# Altium PCB 12.4呼叫器.PcbDoc (part 4 of 5)
Units mm, origin at the board's own origin, x right, y up, seen from the top; angles counter-clockwise.
Board outline 60 x 92 mm, 2 copper layers (Top Layer, Bottom Layer); 66 components, 44 nets, 270 pads, 58 vias.
Unrouted connection lines stored in the file: 4.
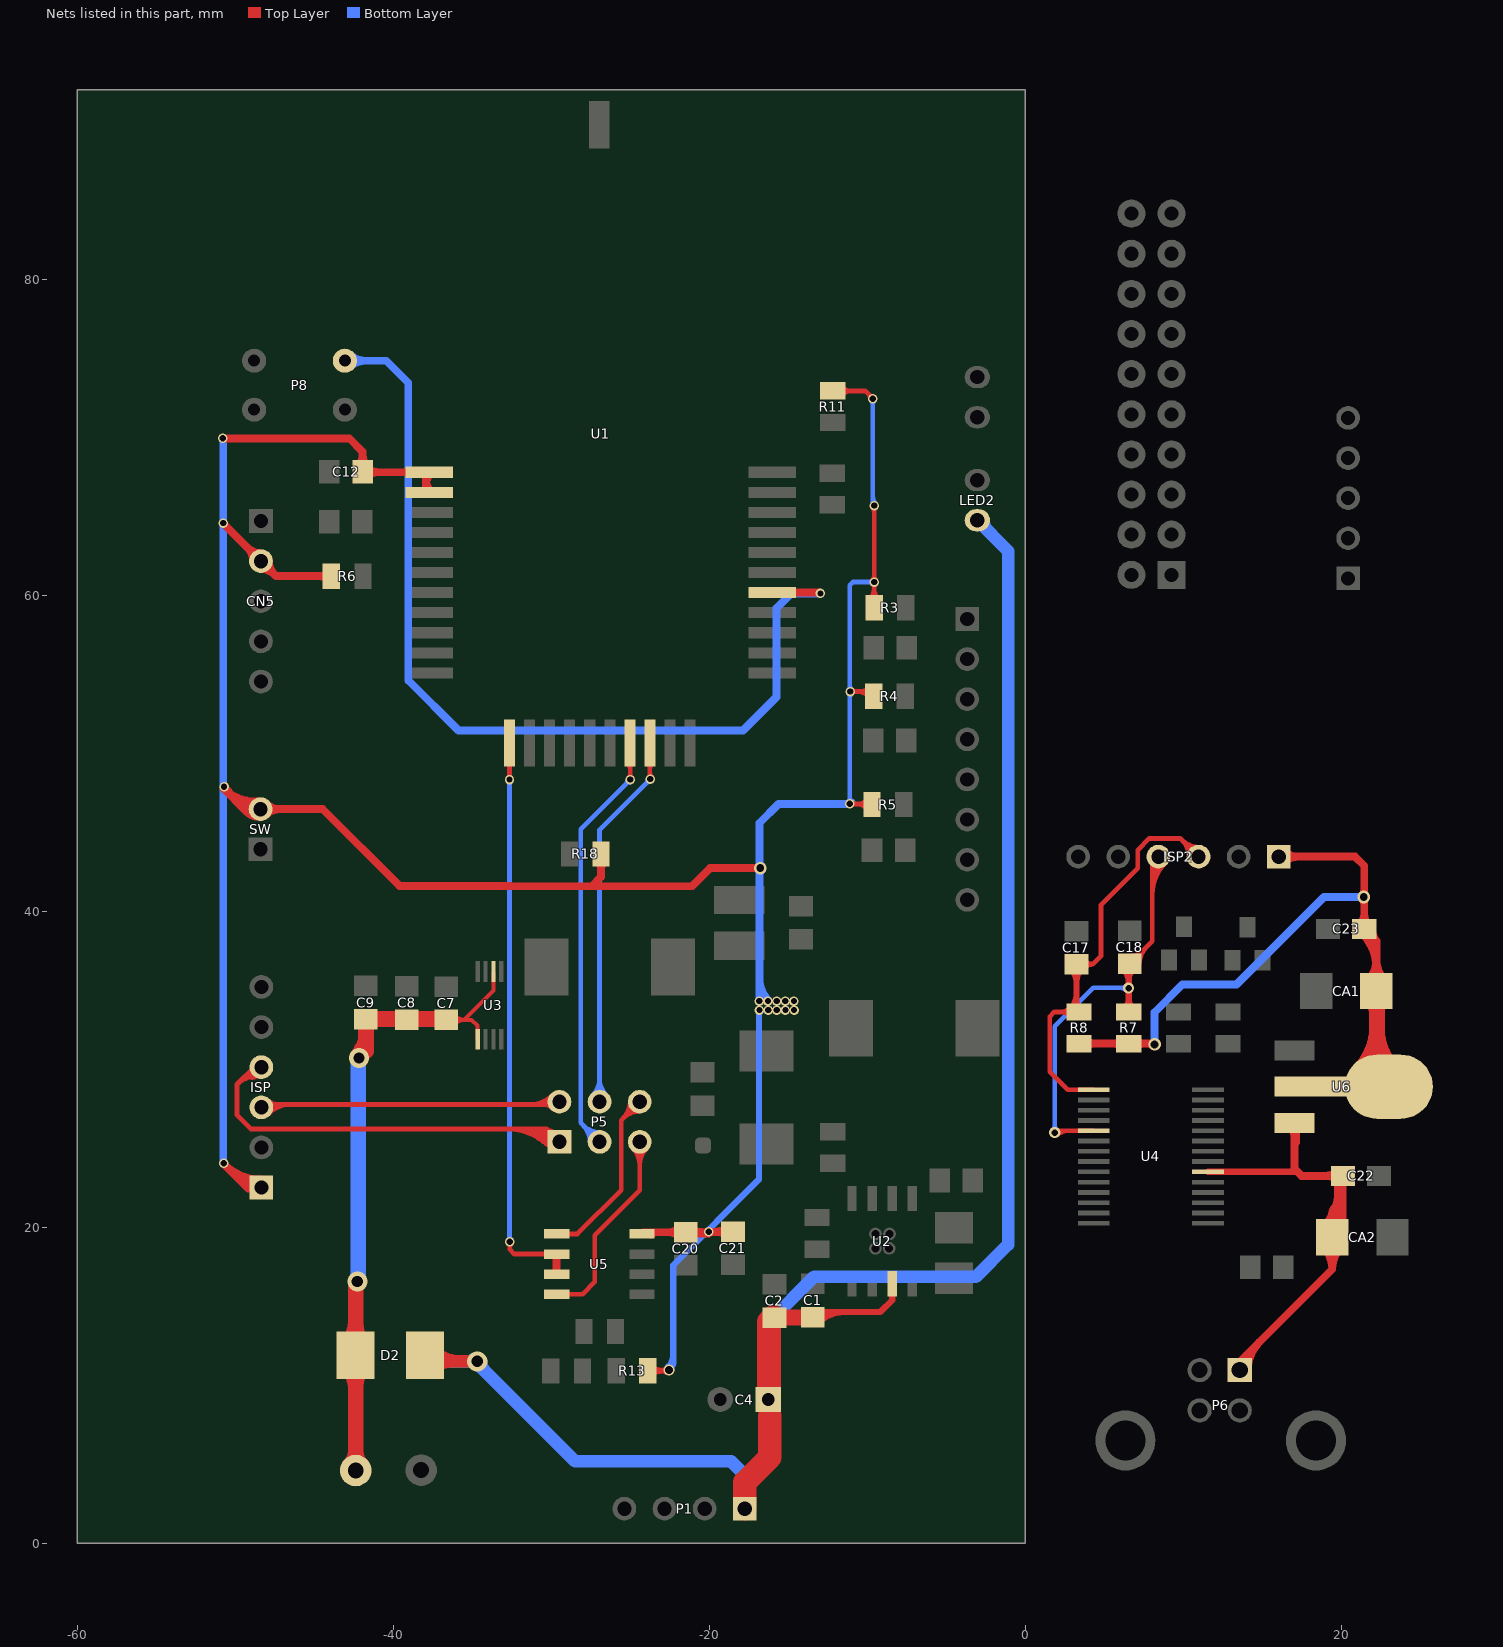
[diagram p4: the nets of this part, all layers, seen from the top]

## Via types
v1: diameter 0.6, hole 0.4, Top Layer to Bottom Layer, 39 vias
v2: diameter 0.7, hole 0.4, Top Layer to Bottom Layer, 11 vias
v3: diameter 1.27, hole 0.711, Top Layer to Bottom Layer, 3 vias
v4: diameter 0.8, hole 0.5, Top Layer to Bottom Layer, 3 vias
v5: diameter 0.65, hole 0.35, Top Layer to Bottom Layer, 1 vias
v6: diameter 0.7, hole 0.5, Top Layer to Bottom Layer, 1 vias

## Nets (pads, with @x,y where several pads share a name; then routed paths per layer and width w, separated by ;. In a path a pad name is that pad's centre, name@x,y a point inside that pad or via, vN(x,y) a via of type N, cw(c..) or ccw(c..) an arc to the next point about the centre after c; other vN are vias at no path point) (continued)
SHINENG: U1.12 U5.2 U5.3 | length 47.2
  Top Layer w0.3: v1(-32.632,48.33) U1.12@-32.632,50.643 ; v1(-32.614,19.071) -32.614,18.593 -32.32,18.299 U5.2@-29.649,18.299 ; U1.12@-32.773,49.352 cw(c-33.115,49.01) -32.632,49.01 ; U1.12@-32.773,49.352 cw(c-33.115,49.01) -32.632,49.01 ; U1.12@-32.773,49.352 cw(c-33.115,49.01) -32.632,49.01 ; v1@-32.738,48.436 ccw(c-32.994,48.692) -32.632,48.692 ; v1@-32.738,48.436 ccw(c-32.994,48.692) -32.632,48.692 ; v1@-32.738,48.436 ccw(c-32.994,48.692) -32.632,48.692 ; v1@-32.72,18.965 cw(c-32.976,18.709) -32.614,18.709 ; v1@-32.72,18.965 cw(c-32.976,18.709) -32.614,18.709 ; v1@-32.72,18.965 cw(c-32.976,18.709) -32.614,18.709 ; -32.632,48.692 ccw(c-32.27,48.692) v1@-32.526,48.436 ; -32.632,48.692 ccw(c-32.27,48.692) v1@-32.526,48.436 ; -32.632,48.692 ccw(c-32.27,48.692) v1@-32.526,48.436 ; -32.632,49.01 cw(c-32.149,49.01) U1.12@-32.491,49.352 ; -32.632,49.01 cw(c-32.149,49.01) U1.12@-32.491,49.352 ; -32.632,49.01 cw(c-32.149,49.01) U1.12@-32.491,49.352 ; -32.614,18.709 cw(c-32.252,18.709) v1@-32.508,18.965 ; -32.614,18.709 cw(c-32.252,18.709) v1@-32.508,18.965 ; -32.614,18.709 cw(c-32.252,18.709) v1@-32.508,18.965 ; -30.512,18.299 cw(c-30.512,17.937) U5.2@-30.255,18.193 ; -30.512,18.299 ccw(c-30.512,18.661) U5.2@-30.255,18.405 ; -30.512,18.299 ccw(c-30.512,18.661) U5.2@-30.255,18.405 ; -30.512,18.299 cw(c-30.512,17.937) U5.2@-30.255,18.193 ; -30.512,18.299 ccw(c-30.512,18.661) U5.2@-30.255,18.405 ; -30.512,18.299 cw(c-30.512,17.937) U5.2@-30.255,18.193
  Top Layer w0.5: U5.3@-29.649,17.029 U5.2@-29.649,18.299
  Bottom Layer w0.3: v1@-32.632,19.068 v1(-32.632,48.33) v1@-32.63,48.33 ; v1@-32.738,48.224 cw(c-32.994,47.968) -32.632,47.968 ; v1@-32.738,48.224 cw(c-32.994,47.968) -32.632,47.968 ; v1@-32.738,48.224 cw(c-32.994,47.968) -32.632,47.968 ; v1@-32.72,19.177 ccw(c-32.932,19.389) -32.632,19.389 ; v1@-32.72,19.177 ccw(c-32.932,19.389) -32.632,19.389 ; v1@-32.72,19.177 ccw(c-32.932,19.389) -32.632,19.389 ; -32.632,19.477 ccw(c-32.208,19.477) v1@-32.508,19.177 ; -32.632,19.477 ccw(c-32.208,19.477) v1@-32.508,19.177 ; -32.632,19.477 ccw(c-32.208,19.477) v1@-32.508,19.177 ; -32.632,47.968 cw(c-32.27,47.968) v1@-32.526,48.224 ; -32.632,47.968 cw(c-32.27,47.968) v1@-32.526,48.224 ; -32.632,47.968 cw(c-32.27,47.968) v1@-32.526,48.224
SRST: P8.1 U1.26 | length 66.6
  Top Layer w0.5: U1.26@-16.003,60.16 -13,60.16 v1(-12.95,60.11)
  Bottom Layer w0.5: P8.1@-43.053,74.84 -40.437,74.84 -39.04,73.443 -39.04,54.61 -35.865,51.435 -17.856,51.435 -15.73,53.561 -15.73,59.18 -14.8,60.11 v1(-12.95,60.11) ; P8.1@-42.691,74.478 cw(c-41.817,73.604) -41.817,74.84 ; P8.1@-42.691,74.478 cw(c-41.817,73.604) -41.817,74.84 ; P8.1@-42.691,74.478 cw(c-41.817,73.604) -41.817,74.84 ; P8.1@-42.691,75.202 ccw(c-41.817,76.076) -41.817,74.84 ; P8.1@-42.691,75.202 ccw(c-41.817,76.076) -41.817,74.84 ; P8.1@-42.691,75.202 ccw(c-41.817,76.076) -41.817,74.84
UART_RXD: P5.5 U1.19 | length 36.2
  Top Layer w0.3: v1@-23.856,48.436 -23.78,48.36 v1(-23.72,48.36) -23.75,48.33 -23.75,50.635 U1.19@-23.742,50.643 ; U1.19@-23.883,49.352 cw(c-24.206,49.029) -23.75,49.029 ; U1.19@-23.883,49.352 cw(c-24.206,49.029) -23.75,49.029 ; U1.19@-23.883,49.352 cw(c-24.206,49.029) -23.75,49.029 ; -23.75,48.795 ccw(c-23.285,48.795) v1@-23.614,48.466 ; -23.75,48.795 ccw(c-23.285,48.795) v1@-23.614,48.466 ; -23.75,48.795 ccw(c-23.285,48.795) v1@-23.614,48.466 ; -23.75,48.991 cw(c-23.24,48.991) U1.19@-23.601,49.352 ; -23.75,48.991 cw(c-23.24,48.991) U1.19@-23.601,49.352 ; -23.75,48.991 cw(c-23.24,48.991) U1.19@-23.601,49.352
  Bottom Layer w0.3: P5.5@-26.93,27.94 -26.93,45.15 v1(-23.72,48.36) ; P5.5@-27.354,28.364 ccw(c-28.379,29.389) -26.93,29.389 ; P5.5@-27.354,28.364 ccw(c-28.379,29.389) -26.93,29.389 ; P5.5@-27.354,28.364 ccw(c-28.379,29.389) -26.93,29.389 ; -26.93,29.389 ccw(c-25.481,29.389) P5.5@-26.506,28.364 ; -26.93,29.389 ccw(c-25.481,29.389) P5.5@-26.506,28.364 ; -26.93,29.389 ccw(c-25.481,29.389) P5.5@-26.506,28.364 ; -23.976,48.104 cw(c-23.72,47.848) v1@-23.72,48.21 ; -23.976,48.104 ccw(c-24.232,48.36) v1@-23.87,48.36 ; -23.976,48.104 ccw(c-24.232,48.36) v1@-23.87,48.36 ; -23.976,48.104 cw(c-23.72,47.848) v1@-23.72,48.21 ; -23.976,48.104 ccw(c-24.232,48.36) v1@-23.87,48.36 ; -23.976,48.104 cw(c-23.72,47.848) v1@-23.72,48.21
"UART_RXD 485": P5.6 U5.1 | length 26.8
  Top Layer w0.3: U5.1@-29.649,19.569 -28.335,19.569 -25.558,22.346 -25.558,26.772 P5.6@-24.39,27.94 ; U5.1@-29.043,19.463 cw(c-28.787,19.207) -28.787,19.569 ; U5.1@-29.043,19.463 cw(c-28.787,19.207) -28.787,19.569 ; U5.1@-29.043,19.463 cw(c-28.787,19.207) -28.787,19.569 ; U5.1@-29.043,19.675 ccw(c-28.787,19.931) -28.787,19.569 ; U5.1@-29.043,19.675 ccw(c-28.787,19.931) -28.787,19.569 ; U5.1@-29.043,19.675 ccw(c-28.787,19.931) -28.787,19.569 ; -25.414,26.916 cw(c-24.39,25.891) P5.6@-24.39,27.34 ; -25.414,26.916 ccw(c-26.439,27.94) P5.6@-24.99,27.94 ; -25.414,26.916 ccw(c-26.439,27.94) P5.6@-24.99,27.94 ; -25.414,26.916 cw(c-24.39,25.891) P5.6@-24.39,27.34 ; -25.414,26.916 ccw(c-26.439,27.94) P5.6@-24.99,27.94 ; -25.414,26.916 cw(c-24.39,25.891) P5.6@-24.39,27.34 ; -25.193,27.184 cw(c-24.18,26.913) P5.6@-24.39,27.94 ; -25.193,27.184 cw(c-24.18,26.913) P5.6@-24.39,27.94 ; -25.193,27.184 cw(c-24.18,26.913) P5.6@-24.39,27.94 ; -25.146,27.137 ccw(c-25.417,28.15) P5.6@-24.39,27.94 ; -25.146,27.137 ccw(c-25.417,28.15) P5.6@-24.39,27.94 ; -25.146,27.137 ccw(c-25.417,28.15) P5.6@-24.39,27.94
UART_RXD_USB: C18.2 ISP2.4 ISP.4 P5.1 R7.1 U4.5 | length 161.1
  Top Layer w0.3: ISP.4@-48.311,30.124 ISP.4@-48.336,30.124 -48.793,30.124 -49.886,29.032 ; -30.429,25.913 ccw(c-29.889,26.22) P5.1@-29.607,25.667 ; -30.274,25.64 ccw(c-29.746,25.94) P5.1@-29.47,25.4 ; P5.1@-30.148,25.976 cw(c-30.141,24.721) P5.1@-29.259,25.613 ; v2(1.88,25.984) 1.995,26.1 U4.5@4.34,26.1 ; C18.2@6.563,36.603 C18.2@6.63,36.67 8.052,38.092 8.052,43.062 ISP2.4@8.44,43.45 ; C18.2@6.73,37.17 ccw(c6.73,38.136) 7.413,37.453 ; C18.2@6.93,36.67 cw(c7.654,36.67) C18.2@7.142,37.182 ; C18.2@7.23,36.67 cw(c8.679,36.67) 7.654,37.694 ; -49.886,29.032 cw(c-48.647,27.794) ISP.4@-48.416,29.53 ; -49.886,29.032 cw(c-48.647,27.794) ISP.4@-48.416,29.53 ; -49.886,29.032 cw(c-48.647,27.794) ISP.4@-48.416,29.53 ; -49.886,29.032 -49.886,27.102 -48.997,26.213 -30.283,26.213 ; -49.456,29.461 cw(c-48.546,28.551) ISP.4@-48.376,29.827 ; -49.456,29.461 cw(c-48.546,28.551) ISP.4@-48.376,29.827 ; -49.456,29.461 cw(c-48.546,28.551) ISP.4@-48.376,29.827 ; -49.042,29.741 cw(c-48.983,29.285) ISP.4@-48.702,29.649 ; -49.042,29.741 cw(c-48.983,29.285) ISP.4@-48.702,29.649 ; -49.042,29.741 cw(c-48.983,29.285) ISP.4@-48.702,29.649 ; -48.931,29.463 ccw(c-49.092,30.707) ISP.4@-48.099,29.941 ; -48.931,29.463 ccw(c-49.092,30.707) ISP.4@-48.099,29.941 ; -48.931,29.463 ccw(c-49.092,30.707) ISP.4@-48.099,29.941 ; -32.881,26.213 cw(c-32.881,21.989) P5.1@-29.894,24.976 ; -32.881,26.213 cw(c-32.881,21.989) P5.1@-29.894,24.976 ; -32.881,26.213 cw(c-32.881,21.989) P5.1@-29.894,24.976 ; -32.157,26.213 cw(c-32.157,22.713) P5.1@-29.682,25.188 ; -32.157,26.213 cw(c-32.157,22.713) P5.1@-29.682,25.188 ; -32.157,26.213 cw(c-32.157,22.713) P5.1@-29.682,25.188 ; -31.432,26.213 cw(c-31.432,23.438) P5.1@-29.47,25.4 ; -31.432,26.213 cw(c-31.432,23.438) P5.1@-29.47,25.4 ; -31.432,26.213 cw(c-31.432,23.438) P5.1@-29.47,25.4 ; -30.914,25.953 ccw(c-30.314,26.92) P5.1@-29.761,25.925 ; -30.914,25.953 ccw(c-30.314,26.92) P5.1@-29.761,25.925 ; -30.914,25.953 ccw(c-30.314,26.92) P5.1@-29.761,25.925 ; -30.821,25.646 ccw(c-30.446,26.164) P5.1@-29.942,25.77 ; -30.821,25.646 ccw(c-30.446,26.164) P5.1@-29.942,25.77 ; -30.821,25.646 ccw(c-30.446,26.164) P5.1@-29.942,25.77 ; -30.714,26.118 cw(c-31.424,24.889) P5.1@-30.05,25.248 ; -30.714,26.118 ccw(c-30.004,27.347) P5.1@-29.629,25.979 ; -30.714,26.118 ccw(c-30.004,27.347) P5.1@-29.629,25.979 ; -30.714,26.118 cw(c-31.424,24.889) P5.1@-30.05,25.248 ; -30.714,26.118 ccw(c-30.004,27.347) P5.1@-29.629,25.979 ; -30.714,26.118 cw(c-31.424,24.889) P5.1@-30.05,25.248 ; -30.708,26.213 cw(c-30.708,24.162) P5.1@-29.258,25.612 ; -30.708,26.213 cw(c-30.708,24.162) P5.1@-29.258,25.612 ; -30.708,26.213 cw(c-30.708,24.162) P5.1@-29.258,25.612 ; -30.568,25.463 ccw(c-30.2,25.972) P5.1@-29.706,25.585 ; -30.568,25.463 ccw(c-30.2,25.972) P5.1@-29.706,25.585 ; -30.568,25.463 ccw(c-30.2,25.972) P5.1@-29.706,25.585 ; -30.48,25.683 ccw(c-30.03,26.409) P5.1@-29.616,25.662 ; -30.48,25.683 ccw(c-30.03,26.409) P5.1@-29.616,25.662 ; -30.48,25.683 ccw(c-30.03,26.409) P5.1@-29.616,25.662 ; -30.316,25.281 ccw(c-29.955,25.779) P5.1@-29.47,25.4 ; -30.316,25.281 ccw(c-29.955,25.779) P5.1@-29.47,25.4 ; -30.316,25.281 ccw(c-29.955,25.779) P5.1@-29.47,25.4 ; -30.283,26.213 cw(c-30.849,25.646) P5.1@-30.061,25.506 ; -30.283,26.213 ccw(c-29.716,26.779) P5.1@-29.576,25.991 ; -30.283,26.213 ccw(c-29.716,26.779) P5.1@-29.576,25.991 ; -30.283,26.213 cw(c-30.849,25.646) P5.1@-30.061,25.506 ; -30.283,26.213 ccw(c-29.716,26.779) P5.1@-29.576,25.991 ; -30.283,26.213 cw(c-30.849,25.646) P5.1@-30.061,25.506 ; -30.283,26.213 P5.1@-29.47,25.4 ; -30.256,25.544 cw(c-30.494,25.16) P5.1@-30.054,25.263 ; -30.256,25.544 cw(c-30.494,25.16) P5.1@-30.054,25.263 ; -30.256,25.544 cw(c-30.494,25.16) P5.1@-30.054,25.263 ; v2@2.021,25.843 cw(c2.642,25.222) 2.642,26.1 ; v2@2.021,25.843 cw(c2.642,25.222) 2.642,26.1 ; v2@2.021,25.843 cw(c2.642,25.222) 2.642,26.1 ; v2@2.052,26.085 ccw(c2.221,26.183) 2.318,26.014 ; v2@2.052,26.085 ccw(c2.221,26.183) 2.318,26.014 ; v2@2.052,26.085 ccw(c2.221,26.183) 2.318,26.014 ; 8.052,41.064 cw(c10.826,41.064) ISP2.4@8.864,43.026 ; 8.052,41.064 cw(c10.826,41.064) ISP2.4@8.864,43.026 ; 8.052,41.064 cw(c10.826,41.064) ISP2.4@8.864,43.026 ; 8.052,41.789 cw(c10.101,41.789) ISP2.4@8.652,43.238 ; 8.052,41.789 cw(c10.101,41.789) ISP2.4@8.652,43.238 ; 8.052,41.789 cw(c10.101,41.789) ISP2.4@8.652,43.238 ; 8.052,42.513 cw(c9.377,42.513) ISP2.4@8.44,43.45 ; 8.052,42.513 cw(c9.377,42.513) ISP2.4@8.44,43.45 ; 8.052,42.513 cw(c9.377,42.513) ISP2.4@8.44,43.45 ; ISP2.4@8.096,42.959 cw(c7.881,42.651) 8.205,42.464 ; ISP2.4@8.096,42.959 cw(c7.881,42.651) 8.205,42.464 ; ISP2.4@8.096,42.959 cw(c7.881,42.651) 8.205,42.464 ; 8.316,42.657 cw(c8.714,42.427) ISP2.4@8.595,42.87 ; 8.316,42.657 cw(c8.714,42.427) ISP2.4@8.595,42.87 ; 8.316,42.657 cw(c8.714,42.427) ISP2.4@8.595,42.87
  Top Layer w0.4: R7.1@6.563,33.62 C18.2@6.563,36.603 ; C18.2@6.212,36.352 cw(c5.363,35.503) 6.563,35.503 ; C18.2@6.212,36.352 cw(c5.363,35.503) 6.563,35.503 ; C18.2@6.212,36.352 cw(c5.363,35.503) 6.563,35.503 ; R7.1@6.316,33.867 ccw(c5.718,34.465) 6.563,34.465 ; R7.1@6.316,33.867 ccw(c5.718,34.465) 6.563,34.465 ; R7.1@6.316,33.867 ccw(c5.718,34.465) 6.563,34.465 ; v2@6.447,35.022 cw(c6.167,34.742) 6.563,34.742 ; v2@6.447,35.022 cw(c6.167,34.742) 6.563,34.742 ; v2@6.447,35.022 cw(c6.167,34.742) 6.563,34.742 ; v2@6.447,35.234 ccw(c6.167,35.515) 6.563,35.515 ; v2@6.447,35.234 ccw(c6.167,35.515) 6.563,35.515 ; v2@6.447,35.234 ccw(c6.167,35.515) 6.563,35.515 ; 6.563,34.465 ccw(c7.408,34.465) R7.1@6.811,33.867 ; 6.563,34.465 ccw(c7.408,34.465) R7.1@6.811,33.867 ; 6.563,34.465 ccw(c7.408,34.465) R7.1@6.811,33.867 ; 6.563,35.664 cw(c7.536,35.664) C18.2@6.848,36.352 ; 6.563,35.664 cw(c7.536,35.664) C18.2@6.848,36.352 ; 6.563,35.664 cw(c7.536,35.664) C18.2@6.848,36.352
  Bottom Layer w0.3: v2(1.88,25.984) 1.88,32.715 4.318,35.154 6.528,35.154 v2(6.553,35.128) ; v2@1.738,26.126 ccw(c1.397,26.467) 1.88,26.467 ; v2@1.738,26.126 ccw(c1.397,26.467) 1.88,26.467 ; v2@1.738,26.126 ccw(c1.397,26.467) 1.88,26.467 ; 1.88,26.467 ccw(c2.362,26.467) v2@2.021,26.126 ; 1.88,26.467 ccw(c2.362,26.467) v2@2.021,26.126 ; 1.88,26.467 ccw(c2.362,26.467) v2@2.021,26.126 ; 6.009,35.154 cw(c6.009,34.584) v2@6.412,34.987 ; 6.009,35.154 cw(c6.009,34.584) v2@6.412,34.987 ; 6.009,35.154 cw(c6.009,34.584) v2@6.412,34.987 ; 6.132,35.154 ccw(c6.132,35.55) v2@6.412,35.27 ; 6.132,35.154 ccw(c6.132,35.55) v2@6.412,35.27 ; 6.132,35.154 ccw(c6.132,35.55) v2@6.412,35.27
UART_TXD: P5.2 U1.18 | length 46.5
  Top Layer w0.3: U1.18@-25.012,50.643 -24.99,50.621 v1(-24.99,48.33) ; U1.18@-25.153,49.352 cw(c-25.548,48.957) -24.99,48.957 ; U1.18@-25.153,49.352 cw(c-25.548,48.957) -24.99,48.957 ; U1.18@-25.153,49.352 cw(c-25.548,48.957) -24.99,48.957 ; v1@-25.096,48.436 ccw(c-25.352,48.692) -24.99,48.692 ; v1@-25.096,48.436 ccw(c-25.352,48.692) -24.99,48.692 ; v1@-25.096,48.436 ccw(c-25.352,48.692) -24.99,48.692 ; -24.99,48.692 ccw(c-24.628,48.692) v1@-24.884,48.436 ; -24.99,48.692 ccw(c-24.628,48.692) v1@-24.884,48.436 ; -24.99,48.692 ccw(c-24.628,48.692) v1@-24.884,48.436 ; -24.99,49.063 cw(c-24.582,49.063) U1.18@-24.871,49.352 ; -24.99,49.063 cw(c-24.582,49.063) U1.18@-24.871,49.352 ; -24.99,49.063 cw(c-24.582,49.063) U1.18@-24.871,49.352
  Bottom Layer w0.3: v1(-24.99,48.33) -28.13,45.19 -28.13,26.6 P5.2@-26.93,25.4 ; -27.954,26.424 cw(c-28.979,25.4) P5.2@-27.53,25.4 ; -27.954,26.424 ccw(c-26.93,27.449) P5.2@-26.93,26 ; -27.954,26.424 ccw(c-26.93,27.449) P5.2@-26.93,26 ; -27.954,26.424 cw(c-28.979,25.4) P5.2@-27.53,25.4 ; -27.954,26.424 ccw(c-26.93,27.449) P5.2@-26.93,26 ; -27.954,26.424 cw(c-28.979,25.4) P5.2@-27.53,25.4 ; -27.733,26.156 ccw(c-26.72,26.427) P5.2@-26.93,25.4 ; -27.733,26.156 ccw(c-26.72,26.427) P5.2@-26.93,25.4 ; -27.733,26.156 ccw(c-26.72,26.427) P5.2@-26.93,25.4 ; -27.686,26.203 cw(c-27.957,25.19) P5.2@-26.93,25.4 ; -27.686,26.203 cw(c-27.957,25.19) P5.2@-26.93,25.4 ; -27.686,26.203 cw(c-27.957,25.19) P5.2@-26.93,25.4 ; -25.246,48.074 cw(c-24.99,47.818) v1@-24.99,48.18 ; -25.246,48.074 ccw(c-25.502,48.33) v1@-25.14,48.33 ; -25.246,48.074 ccw(c-25.502,48.33) v1@-25.14,48.33 ; -25.246,48.074 cw(c-24.99,47.818) v1@-24.99,48.18 ; -25.246,48.074 ccw(c-25.502,48.33) v1@-25.14,48.33 ; -25.246,48.074 cw(c-24.99,47.818) v1@-24.99,48.18
"UART_TXD 485": P5.3 U5.4 | length 21.3
  Top Layer w0.3: U5.4@-29.649,15.759 -28.005,15.759 -27.229,16.535 -27.229,19.494 -24.39,22.333 P5.3@-24.39,25.4 ; U5.4@-29.043,15.653 cw(c-28.787,15.397) -28.787,15.759 ; U5.4@-29.043,15.653 cw(c-28.787,15.397) -28.787,15.759 ; U5.4@-29.043,15.653 cw(c-28.787,15.397) -28.787,15.759 ; U5.4@-29.043,15.865 ccw(c-28.787,16.121) -28.787,15.759 ; U5.4@-29.043,15.865 ccw(c-28.787,16.121) -28.787,15.759 ; U5.4@-29.043,15.865 ccw(c-28.787,16.121) -28.787,15.759 ; P5.3@-24.814,24.976 cw(c-25.839,23.951) -24.39,23.951 ; P5.3@-24.814,24.976 cw(c-25.839,23.951) -24.39,23.951 ; P5.3@-24.814,24.976 cw(c-25.839,23.951) -24.39,23.951 ; -24.39,23.951 cw(c-22.941,23.951) P5.3@-23.966,24.976 ; -24.39,23.951 cw(c-22.941,23.951) P5.3@-23.966,24.976 ; -24.39,23.951 cw(c-22.941,23.951) P5.3@-23.966,24.976
UART_TXD_USB: C17.2 ISP2.3 ISP.3 P5.4 R8.1 U4.1 | length 95.5
  Top Layer w0.3: ISP.3@-48.336,27.584 -48.158,27.762 -29.648,27.762 P5.4@-29.47,27.94 ; R8.1@3.25,33.62 1.86,33.62 1.57,33.33 1.57,29.83 2.7,28.7 U4.1@4.34,28.7 ; C17.2@3.25,36.64 4.28,36.64 ; ISP.3@-48.124,27.372 cw(c-47.183,26.431) -47.183,27.762 ; ISP.3@-48.124,27.372 cw(c-47.183,26.431) -47.183,27.762 ; ISP.3@-48.124,27.372 cw(c-47.183,26.431) -47.183,27.762 ; ISP.3@-47.912,27.16 cw(c-46.458,25.707) -46.458,27.762 ; ISP.3@-47.912,27.16 cw(c-46.458,25.707) -46.458,27.762 ; ISP.3@-47.912,27.16 cw(c-46.458,25.707) -46.458,27.762 ; ISP.3@-47.912,28.009 ccw(c-47.317,28.604) -47.317,27.762 ; ISP.3@-47.912,28.009 ccw(c-47.317,28.604) -47.317,27.762 ; ISP.3@-47.912,28.009 ccw(c-47.317,28.604) -47.317,27.762 ; -31.348,27.762 ccw(c-31.348,29.818) P5.4@-29.894,28.364 ; -31.348,27.762 ccw(c-31.348,29.818) P5.4@-29.894,28.364 ; -31.348,27.762 ccw(c-31.348,29.818) P5.4@-29.894,28.364 ; -30.624,27.762 ccw(c-30.624,29.094) P5.4@-29.682,28.152 ; -30.624,27.762 ccw(c-30.624,29.094) P5.4@-29.682,28.152 ; -30.624,27.762 ccw(c-30.624,29.094) P5.4@-29.682,28.152 ; -30.489,27.762 cw(c-30.489,26.921) P5.4@-29.894,27.516 ; -30.489,27.762 cw(c-30.489,26.921) P5.4@-29.894,27.516 ; -30.489,27.762 cw(c-30.489,26.921) P5.4@-29.894,27.516 ; 2.204,33.62 cw(c2.204,32.654) R8.1@2.887,33.337 ; 2.204,33.62 ccw(c2.204,34.586) R8.1@2.887,33.903 ; 2.204,33.62 ccw(c2.204,34.586) R8.1@2.887,33.903 ; 2.204,33.62 cw(c2.204,32.654) R8.1@2.887,33.337 ; 2.204,33.62 ccw(c2.204,34.586) R8.1@2.887,33.903 ; 2.204,33.62 cw(c2.204,32.654) R8.1@2.887,33.337 ; C17.2@3.767,36.364 cw(c4.28,36.024) 4.28,36.64 ; C17.2@3.767,36.364 cw(c4.28,36.024) 4.28,36.64 ; C17.2@3.767,36.364 cw(c4.28,36.024) 4.28,36.64 ; C17.2@3.767,36.916 ccw(c4.28,37.256) 4.28,36.64 ; C17.2@3.767,36.916 ccw(c4.28,37.256) 4.28,36.64 ; C17.2@3.767,36.916 ccw(c4.28,37.256) 4.28,36.64 ; 4.28,36.64 4.801,37.16 4.801,40.386 7.137,42.723 7.137,43.866 7.874,44.602 9.828,44.602 ISP2.3@10.98,43.45 ; 9.956,44.474 cw(c8.931,43.45) ISP2.3@10.38,43.45 ; 9.956,44.474 ccw(c10.98,45.499) ISP2.3@10.98,44.05 ; 9.956,44.474 ccw(c10.98,45.499) ISP2.3@10.98,44.05 ; 9.956,44.474 cw(c8.931,43.45) ISP2.3@10.38,43.45 ; 9.956,44.474 ccw(c10.98,45.499) ISP2.3@10.98,44.05 ; 9.956,44.474 cw(c8.931,43.45) ISP2.3@10.38,43.45 ; 10.177,44.206 ccw(c11.19,44.477) ISP2.3@10.98,43.45 ; 10.177,44.206 ccw(c11.19,44.477) ISP2.3@10.98,43.45 ; 10.177,44.206 ccw(c11.19,44.477) ISP2.3@10.98,43.45 ; 10.224,44.253 cw(c9.953,43.24) ISP2.3@10.98,43.45 ; 10.224,44.253 cw(c9.953,43.24) ISP2.3@10.98,43.45 ; 10.224,44.253 cw(c9.953,43.24) ISP2.3@10.98,43.45
  Top Layer w0.4: R8.1@3.25,33.79 C17.2@3.25,36.64 ; R8.1@2.923,33.867 ccw(c2.132,34.658) 3.25,34.658 ; R8.1@2.923,33.867 ccw(c2.132,34.658) 3.25,34.658 ; R8.1@2.923,33.867 ccw(c2.132,34.658) 3.25,34.658 ; C17.2@2.932,36.322 cw(c2.164,35.554) 3.25,35.554 ; C17.2@2.932,36.322 cw(c2.164,35.554) 3.25,35.554 ; C17.2@2.932,36.322 cw(c2.164,35.554) 3.25,35.554 ; 3.25,34.272 ccw(c3.822,34.272) R8.1@3.417,33.867 ; 3.25,34.272 ccw(c3.822,34.272) R8.1@3.417,33.867 ; 3.25,34.272 ccw(c3.822,34.272) R8.1@3.417,33.867 ; 3.25,35.554 cw(c4.336,35.554) C17.2@3.568,36.322 ; 3.25,35.554 cw(c4.336,35.554) C17.2@3.568,36.322 ; 3.25,35.554 cw(c4.336,35.554) C17.2@3.568,36.322
VCC: C22.2 CA2.1 P6.1 U4.20 U6.3 | length 60.3
  Top Layer w0.4: U4.20@11.579,23.5 17.24,23.5
  Top Layer w0.5: P6.1@13.589,10.947 13.589,11.481 19.444,17.336 CA2.1@19.444,19.363 CA2.1@19.96,19.879 ; P6.1@13.602,10.947 cw(c14.92,10.947) 13.988,11.88 ; P6.1@14.102,10.947 cw(c16.627,10.947) 14.841,12.733 ; 17.156,25.35 17.156,26.491 U6.3@17.056,26.591 17.056,23.684 17.24,23.5 17.49,23.25 C22.2@20.124,23.25 ; CA2.1@18.897,18.697 cw(c17.575,17.375) 19.444,17.375 cw(c21.313,17.375) CA2.1@19.991,18.697 ; U6.3@16.784,26.319 cw(c15.886,25.42) 17.156,25.42 ; U6.3@16.784,26.319 cw(c16.127,25.662) 17.056,25.662 ; U6.3@16.784,26.319 cw(c15.886,25.42) 17.156,25.42 ; U6.3@16.784,26.319 cw(c16.127,25.662) 17.056,25.662 ; U6.3@16.784,26.319 cw(c15.886,25.42) 17.156,25.42 ; U6.3@16.784,26.319 cw(c16.127,25.662) 17.056,25.662 ; 17.056,25.662 cw(c17.986,25.662) U6.3@17.329,26.319 ; 17.056,25.662 cw(c17.986,25.662) U6.3@17.329,26.319 ; 17.056,25.662 cw(c17.986,25.662) U6.3@17.329,26.319 ; 17.156,25.903 cw(c17.744,25.903) U6.3@17.329,26.319 ; 17.156,25.903 cw(c17.744,25.903) U6.3@17.329,26.319 ; 17.156,25.903 cw(c17.744,25.903) U6.3@17.329,26.319 ; 19.068,23.25 cw(c19.068,22.321) C22.2@19.725,22.978 ; 19.068,23.25 ccw(c19.068,24.179) C22.2@19.725,23.522 ; 19.068,23.25 ccw(c19.068,24.179) C22.2@19.725,23.522 ; 19.068,23.25 cw(c19.068,22.321) C22.2@19.725,22.978 ; 19.068,23.25 ccw(c19.068,24.179) C22.2@19.725,23.522 ; 19.068,23.25 cw(c19.068,22.321) C22.2@19.725,22.978
  Top Layer w0.8: CA2.1@19.96,19.879 19.96,23.086 C22.2@20.124,23.25 ; CA2.1@19.003,19.923 ccw(c16.692,22.234) 19.96,22.234 ; CA2.1@19.003,19.923 ccw(c16.692,22.234) 19.96,22.234 ; CA2.1@19.003,19.923 ccw(c16.692,22.234) 19.96,22.234 ; 19.675,21.087 ccw(c20.465,20.631) CA2.1@19.859,19.948 ; 19.675,21.087 ccw(c20.465,20.631) CA2.1@19.859,19.948 ; 19.675,21.087 ccw(c20.465,20.631) CA2.1@19.859,19.948 ; 19.96,22.593 cw(c20.654,22.593) C22.2@20.163,23.084 ; 19.96,22.593 cw(c20.654,22.593) C22.2@20.163,23.084 ; 19.96,22.593 cw(c20.654,22.593) C22.2@20.163,23.084
VCC_9V: C7.2 C8.2 C9.2 D2.1 pad.1@-42.367,4.597 U3.1 U3.8 | length 73.2
  Top Layer w0.254: C7.2@-36.5,33.126 -35.504,33.126 ; U3.1@-34.648,31.906 -34.648,32.748 -35.026,33.126 -35.504,33.126 ; U3.8@-33.648,36.081 -33.648,34.982 -35.504,33.126 ; C7.2@-36.117,32.816 cw(c-35.504,32.365) -35.504,33.126 ; C7.2@-36.117,32.816 cw(c-35.504,32.365) -35.504,33.126 ; C7.2@-36.117,32.816 cw(c-35.504,32.365) -35.504,33.126 ; C7.2@-36.117,33.436 ccw(c-35.504,33.887) -35.504,33.126 ; C7.2@-36.117,33.436 ccw(c-35.504,33.887) -35.504,33.126 ; C7.2@-36.117,33.436 ccw(c-35.504,33.887) -35.504,33.126
  Top Layer w1: v3(-42.266,16.561) -42.367,16.459 pad.1@-42.367,4.597 pad.1@-42.113,4.851 ; v3(-42.164,30.709) -41.721,31.151 C9.2@-41.721,33.166 -36.539,33.166 C7.2@-36.5,33.126 ; D2.1@-42.883,11.109 cw(c-44.128,9.864) -42.367,9.864 ; D2.1@-42.883,11.109 cw(c-44.128,9.864) -42.367,9.864 ; D2.1@-42.883,11.109 cw(c-44.128,9.864) -42.367,9.864 ; D2.1@-42.883,12.699 ccw(c-44.128,13.945) -42.367,13.945 ; D2.1@-42.883,12.699 ccw(c-44.128,13.945) -42.367,13.945 ; D2.1@-42.883,12.699 ccw(c-44.128,13.945) -42.367,13.945 ; pad.1@-42.721,4.951 ccw(c-43.574,5.805) -42.367,5.805 ; pad.1@-42.721,4.951 ccw(c-43.574,5.805) -42.367,5.805 ; pad.1@-42.721,4.951 ccw(c-43.574,5.805) -42.367,5.805 ; -42.367,5.805 ccw(c-41.16,5.805) pad.1@-42.014,4.951 ; -42.367,5.805 ccw(c-41.16,5.805) pad.1@-42.014,4.951 ; -42.367,5.805 ccw(c-41.16,5.805) pad.1@-42.014,4.951 ; -42.367,9.965 cw(c-40.748,9.965) D2.1@-41.893,11.109 ; -42.367,9.965 cw(c-40.748,9.965) D2.1@-41.893,11.109 ; -42.367,9.965 cw(c-40.748,9.965) D2.1@-41.893,11.109 ; -42.367,13.844 ccw(c-40.748,13.844) D2.1@-41.893,12.699 ; -42.367,13.844 ccw(c-40.748,13.844) D2.1@-41.893,12.699 ; -42.367,13.844 ccw(c-40.748,13.844) D2.1@-41.893,12.699 ; v3@-42.259,30.804 ccw(c-43.559,32.104) -41.721,32.104 ; v3@-42.259,30.804 ccw(c-43.559,32.104) -41.721,32.104 ; v3@-42.259,30.804 ccw(c-43.559,32.104) -41.721,32.104 ; v3@-42.034,30.744 cw(c-41.289,30.943) -41.957,31.329 ; v3@-42.034,30.744 cw(c-41.289,30.943) -41.957,31.329 ; v3@-42.034,30.744 cw(c-41.289,30.943) -41.957,31.329
  Bottom Layer w1: v3@-42.2,16.383 v3@-42.2,30.709
VCC_24V: C1.2 C2.2 C4.1 D2.2 LED2.1 P1.1 U2.7 | length 148
  Top Layer w0.4: C1.2@-13.355,14.385 -13.11,14.63 -9.164,14.63 -8.414,15.38 U2.7@-8.414,16.41 ; C1.2@-13.295,14.275 cw(c-12.437,13.417) -12.437,14.63 ; C1.2@-13.295,14.275 cw(c-12.437,13.417) -12.437,14.63 ; C1.2@-13.295,14.275 cw(c-12.437,13.417) -12.437,14.63 ; C1.2@-13.012,13.992 cw(c-11.471,12.451) -11.471,14.63 ; C1.2@-13.012,13.992 cw(c-11.471,12.451) -11.471,14.63 ; C1.2@-13.012,13.992 cw(c-11.471,12.451) -11.471,14.63
  Top Layer w0.8: D2.2@-37.988,11.904 -37.59,11.506 v3(-34.671,11.506) ; D2.2@-37.422,11.039 cw(c-36.294,9.91) -36.294,11.506 ; D2.2@-37.422,11.039 cw(c-36.294,9.91) -36.294,11.506 ; D2.2@-37.422,11.039 cw(c-36.294,9.91) -36.294,11.506 ; D2.2@-37.422,12.17 ccw(c-35.82,13.773) -35.82,11.506 ; D2.2@-37.422,12.17 ccw(c-35.82,13.773) -35.82,11.506 ; D2.2@-37.422,12.17 ccw(c-35.82,13.773) -35.82,11.506
  Top Layer w1: C2.2@-15.92,14.31 C2.2@-15.86,14.31 ; C2.2@-15.86,14.28 C1.2@-13.25,14.28
  Top Layer w1.5: P1.1@-17.74,2.18 -17.74,3.85 -16.16,5.43 -16.16,8.05 ; C4.1@-16.211,9.446 -16.211,14.019 C2.2@-15.92,14.31
  Bottom Layer w0.8: -37.567,11.633 -37.44,11.506 v3@-34.798,11.506 ; v3@-34.925,11.633 v3@-34.798,11.506 ; v3(-34.671,11.506) v3@-34.798,11.506 ; P1.1@-17.74,2.18 -17.74,4.31 -18.612,5.182 -28.473,5.182 v3@-34.798,11.506 ; C4.1@-16.246,9.09 -16.246,13.963 -13.349,16.86 -3.11,16.86 -1.07,18.9 -1.07,62.79 LED2.1@-3.02,64.74 ; v3@-34.436,11.506 ccw(c-33.562,11.506) -34.18,10.888 ; v3@-34.436,11.506 ccw(c-33.562,11.506) -34.18,10.888 ; v3@-34.436,11.506 ccw(c-33.562,11.506) -34.18,10.888 ; P1.1@-17.987,2.427 ccw(c-18.585,3.025) -17.74,3.025 ; P1.1@-17.987,2.427 ccw(c-18.585,3.025) -17.74,3.025 ; P1.1@-17.987,2.427 ccw(c-18.585,3.025) -17.74,3.025 ; -17.74,3.025 ccw(c-16.895,3.025) P1.1@-17.493,2.427 ; -17.74,3.025 ccw(c-16.895,3.025) P1.1@-17.493,2.427 ; -17.74,3.025 ccw(c-16.895,3.025) P1.1@-17.493,2.427 ; C4.1@-16.529,9.373 ccw(c-17.212,10.056) -16.246,10.056 ; C4.1@-16.529,9.373 ccw(c-17.212,10.056) -16.246,10.056 ; C4.1@-16.529,9.373 ccw(c-17.212,10.056) -16.246,10.056 ; -16.246,10.056 ccw(c-15.28,10.056) C4.1@-15.963,9.373 ; -16.246,10.056 ccw(c-15.28,10.056) C4.1@-15.963,9.373 ; -16.246,10.056 ccw(c-15.28,10.056) C4.1@-15.963,9.373 ; LED2.1@-2.62,64.74 ccw(c-1.654,64.74) -2.337,64.057 ; LED2.1@-2.62,64.74 ccw(c-1.654,64.74) -2.337,64.057 ; LED2.1@-2.62,64.74 ccw(c-1.654,64.74) -2.337,64.057
VDD33: C12.2 C20.2 C21.2 C23.2 CA1.1 CN5.2 ISP2.1 ISP.1 R3.2 R4.2 R5.2 R6.2 R7.2 R8.2 R11.1 R13.2 R18.2 SW.2 U1.1 U1.2 U5.8 U6.2 | length 450.1
  Top Layer w0.3: R13.2@-23.76,10.95 v6(-22.53,10.95) ; v1@-15.75,34.335 v1(-15.725,34.31) ; R11.1@-12.18,72.93 -10.13,72.93 v1(-9.64,72.44) ; v1(-11.1,46.79) -9.728,46.79 R5.2@-9.688,46.75 ; v1(-11.074,53.899) -9.877,53.899 R4.2@-9.587,53.608 ; R3.2@-9.55,59.21 v1(-9.55,65.67) ; R13.2@-23.587,10.627 cw(c-22.808,9.848) v6@-22.808,10.95 ; R13.2@-23.587,10.627 cw(c-22.808,9.848) v6@-22.808,10.95 ; R13.2@-23.587,10.627 cw(c-22.808,9.848) v6@-22.808,10.95 ; R13.2@-23.587,11.193 ccw(c-23.001,11.779) -23.001,10.95 ; R13.2@-23.587,11.193 ccw(c-23.001,11.779) -23.001,10.95 ; R13.2@-23.587,11.193 ccw(c-23.001,11.779) -23.001,10.95 ; -23.183,10.85 cw(c-22.994,10.146) v6@-22.63,10.777 ; -23.183,10.85 cw(c-22.994,10.146) v6@-22.63,10.777 ; -23.183,10.85 cw(c-22.994,10.146) v6@-22.63,10.777 ; -23.183,10.85 cw(c-22.994,10.146) v6@-22.63,10.777 ; -23.183,10.85 cw(c-22.994,10.146) v6@-22.63,10.777 ; -23.183,10.85 cw(c-22.994,10.146) v6@-22.63,10.777 ; -23.013,10.95 cw(c-23.013,10.467) v6@-22.671,10.809 ; -23.013,10.95 ccw(c-23.013,11.433) v6@-22.671,11.091 ; -23.013,10.95 ccw(c-23.013,11.433) v6@-22.671,11.091 ; -23.013,10.95 cw(c-23.013,10.467) v6@-22.671,10.809 ; -23.013,10.95 ccw(c-23.013,11.433) v6@-22.671,11.091 ; -23.013,10.95 cw(c-23.013,10.467) v6@-22.671,10.809 ; R11.1@-11.647,72.647 cw(c-10.964,71.964) -10.964,72.93 ; R11.1@-11.647,72.647 cw(c-10.964,71.964) -10.964,72.93 ; R11.1@-11.647,72.647 cw(c-10.964,71.964) -10.964,72.93 ; R11.1@-11.647,73.213 ccw(c-10.964,73.896) -10.964,72.93 ; R11.1@-11.647,73.213 ccw(c-10.964,73.896) -10.964,72.93 ; R11.1@-11.647,73.213 ccw(c-10.964,73.896) -10.964,72.93 ; v1@-10.994,46.684 cw(c-10.738,46.428) -10.738,46.79 ; v1@-10.994,46.684 cw(c-10.738,46.428) -10.738,46.79 ; v1@-10.994,46.684 cw(c-10.738,46.428) -10.738,46.79 ; v1@-10.994,46.896 ccw(c-10.738,47.152) -10.738,46.79 ; v1@-10.994,46.896 ccw(c-10.738,47.152) -10.738,46.79 ; v1@-10.994,46.896 ccw(c-10.738,47.152) -10.738,46.79 ; v1@-10.968,53.793 cw(c-10.712,53.537) -10.712,53.899 ; v1@-10.968,53.793 cw(c-10.712,53.537) -10.712,53.899 ; v1@-10.968,53.793 cw(c-10.712,53.537) -10.712,53.899 ; v1@-10.968,54.005 ccw(c-10.712,54.261) -10.712,53.899 ; v1@-10.968,54.005 ccw(c-10.712,54.261) -10.712,53.899 ; v1@-10.968,54.005 ccw(c-10.712,54.261) -10.712,53.899 ; -10.749,46.79 cw(c-10.749,45.689) R5.2@-9.971,46.468 ; -10.749,46.79 cw(c-10.749,45.689) R5.2@-9.971,46.468 ; -10.749,46.79 cw(c-10.749,45.689) R5.2@-9.971,46.468 ; -10.65,53.899 cw(c-10.65,52.795) R4.2@-9.869,53.576 ; -10.65,53.899 cw(c-10.65,52.795) R4.2@-9.869,53.576 ; -10.65,53.899 cw(c-10.65,52.795) R4.2@-9.869,53.576 ; -10.558,46.79 ccw(c-10.558,47.62) R5.2@-9.971,47.033 ; -10.558,46.79 ccw(c-10.558,47.62) R5.2@-9.971,47.033 ; -10.558,46.79 ccw(c-10.558,47.62) R5.2@-9.971,47.033 ; -10.455,53.899 ccw(c-10.455,54.727) R4.2@-9.869,54.141 ; -10.455,53.899 ccw(c-10.455,54.727) R4.2@-9.869,54.141 ; -10.455,53.899 ccw(c-10.455,54.727) R4.2@-9.869,54.141 ; -9.896,72.696 cw(c-10.152,72.44) v1@-9.79,72.44 ; -9.896,72.696 ccw(c-9.64,72.952) v1@-9.64,72.59 ; -9.896,72.696 ccw(c-9.64,72.952) v1@-9.64,72.59 ; -9.896,72.696 cw(c-10.152,72.44) v1@-9.79,72.44 ; -9.896,72.696 ccw(c-9.64,72.952) v1@-9.64,72.59 ; -9.896,72.696 cw(c-10.152,72.44) v1@-9.79,72.44 ; R3.2@-9.833,59.743 ccw(c-10.516,60.426) -9.55,60.426 ; R3.2@-9.833,59.743 ccw(c-10.516,60.426) -9.55,60.426 ; R3.2@-9.833,59.743 ccw(c-10.516,60.426) -9.55,60.426 ; v1@-9.656,60.727 cw(c-9.914,60.47) -9.55,60.47 ; v1@-9.656,60.727 cw(c-9.914,60.47) -9.55,60.47 ; v1@-9.656,60.727 cw(c-9.914,60.47) -9.55,60.47 ; v1@-9.656,60.939 ccw(c-9.914,61.196) -9.55,61.196 ; v1@-9.656,60.939 ccw(c-9.914,61.196) -9.55,61.196 ; v1@-9.656,60.939 ccw(c-9.914,61.196) -9.55,61.196 ; v1@-9.656,65.564 cw(c-9.912,65.308) -9.55,65.308 ; v1@-9.656,65.564 cw(c-9.912,65.308) -9.55,65.308 ; v1@-9.656,65.564 cw(c-9.912,65.308) -9.55,65.308 ; -9.55,60.426 ccw(c-8.584,60.426) R3.2@-9.267,59.743 ; -9.55,60.426 ccw(c-8.584,60.426) R3.2@-9.267,59.743 ; -9.55,60.426 ccw(c-8.584,60.426) R3.2@-9.267,59.743 ; -9.55,60.472 cw(c-9.189,60.472) v1@-9.444,60.727 ; -9.55,60.472 cw(c-9.189,60.472) v1@-9.444,60.727 ; -9.55,60.472 cw(c-9.189,60.472) v1@-9.444,60.727 ; -9.55,61.194 ccw(c-9.189,61.194) v1@-9.444,60.939 ; -9.55,61.194 ccw(c-9.189,61.194) v1@-9.444,60.939 ; -9.55,61.194 ccw(c-9.189,61.194) v1@-9.444,60.939 ; -9.55,65.308 cw(c-9.188,65.308) v1@-9.444,65.564 ; -9.55,65.308 cw(c-9.188,65.308) v1@-9.444,65.564 ; -9.55,65.308 cw(c-9.188,65.308) v1@-9.444,65.564
  Top Layer w0.5: v1(-50.775,69.926) -42.774,69.926 -41.929,69.081 C12.2@-41.929,67.804 ; v1@-50.749,24.028 -49.149,22.428 ; v1@-50.749,64.541 CN5.2@-48.362,62.154 ; SW.2@-48.387,46.37 -49.342,46.37 ; R6.2@-43.902,61.203 -47.411,61.203 CN5.2@-48.362,62.154 ; C12.2@-41.814,67.918 -41.676,67.78 U1.1@-37.92,67.78 ; U1.2@-37.704,66.51 -37.92,66.726 U1.1@-37.92,67.78 ; U1.1@-37.704,67.78 U1.1@-37.92,67.78 ; R18.2@-26.837,43.623 -26.837,42.175 -27.432,41.58 ; U5.8@-24.139,19.68 C20.2@-21.48,19.68 ; C20.2@-21.48,19.606 v1@-20.03,19.606 ; v1(-20.03,19.7) -18.5,19.7 C21.2@-18.49,19.71 ; v4(-16.764,42.723) -19.939,42.723 -21.082,41.58 -27.432,41.58 ; R8.2@3.42,31.62 R7.2@6.563,31.62 8.156,31.62 v4(8.204,31.572) ; ISP2.1@16.06,43.45 20.888,43.45 21.466,42.872 C23.2@21.466,38.88 22.236,38.11 ; C23.2@21.321,38.608 cw(c19.111,36.398) 22.236,36.398 ; C23.2@21.593,38.495 cw(c21.593,37.872) C23.2@22.033,38.313 ; C23.2@21.674,38.961 cw(c20.318,37.605) 22.236,37.605 ; CA1.1@21.689,35.603 ccw(c20.367,36.925) 22.236,36.925 ccw(c24.105,36.925) CA1.1@22.783,35.603 ; C23.2@21.976,38.841 ccw(c22.875,38.749) 22.236,38.11 ; CA1.1@22.236,34.937 22.236,38.11 ; U6.2@23.025,28.89 U6.2@23.445,29.31 ; v1@-50.749,47.777 ccw(c-48.726,49.8) SW.2@-48.437,46.954 ; v1@-50.749,47.777 ccw(c-48.726,49.8) SW.2@-48.437,46.954 ; v1@-50.749,47.777 ccw(c-48.726,49.8) SW.2@-48.437,46.954 ; v1@-50.749,47.777 -49.342,46.37 ; v1@-50.707,23.987 ccw(c-48.336,26.358) ISP.1@-48.336,23.004 ; v1@-50.707,23.987 ccw(c-48.336,26.358) ISP.1@-48.336,23.004 ; v1@-50.707,23.987 ccw(c-48.336,26.358) ISP.1@-48.336,23.004 ; v1@-50.65,47.888 ccw(c-50.173,48.016) -50.42,47.587 ; v1@-50.65,47.888 ccw(c-50.173,48.016) -50.42,47.587 ; v1@-50.65,47.888 ccw(c-50.173,48.016) -50.42,47.587 ; v1@-50.65,47.888 ccw(c-50.173,48.016) -50.42,47.587 ; v1@-50.65,47.888 ccw(c-50.173,48.016) -50.42,47.587 ; v1@-50.65,47.888 ccw(c-50.173,48.016) -50.42,47.587 ; v1@-50.649,47.875 ccw(c-50.171,47.875) -50.509,47.537 ; v1@-50.649,47.875 ccw(c-50.171,47.875) -50.509,47.537 ; v1@-50.649,47.875 ccw(c-50.171,47.875) -50.509,47.537 ; -50.004,47.033 ccw(c-48.589,48.448) SW.2@-48.387,46.457 ; -50.004,47.033 ccw(c-48.589,48.448) SW.2@-48.387,46.457 ; -50.004,47.033 ccw(c-48.589,48.448) SW.2@-48.387,46.457 ; -49.854,23.133 ccw(c-48.336,24.651) ISP.1@-48.336,22.504 ; -49.854,23.133 ccw(c-48.336,24.651) ISP.1@-48.336,22.504 ; -49.854,23.133 ccw(c-48.336,24.651) ISP.1@-48.336,22.504 ; -49.409,22.792 cw(c-49.664,21.841) ISP.1@-48.784,22.281 ; -49.409,22.792 ccw(c-49.155,23.743) ISP.1@-48.612,22.922 ; -49.409,22.792 ccw(c-49.155,23.743) ISP.1@-48.612,22.922 ; -49.409,22.792 cw(c-49.664,21.841) ISP.1@-48.784,22.281 ; -49.409,22.792 ccw(c-49.155,23.743) ISP.1@-48.612,22.922 ; -49.409,22.792 cw(c-49.664,21.841) ISP.1@-48.784,22.281 ; -49.41,46.622 cw(c-49.541,45.81) SW.2@-48.823,46.212 ; -49.41,46.622 ccw(c-49.278,47.435) SW.2@-48.724,46.826 ; -49.41,46.622 ccw(c-49.278,47.435) SW.2@-48.724,46.826 ; -49.41,46.622 cw(c-49.541,45.81) SW.2@-48.823,46.212 ; -49.41,46.622 ccw(c-49.278,47.435) SW.2@-48.724,46.826 ; -49.41,46.622 cw(c-49.541,45.81) SW.2@-48.823,46.212 ; -49.342,46.37 cw(c-49.342,45.561) SW.2@-48.752,46.114 ; -49.342,46.37 ccw(c-49.342,46.94) SW.2@-48.833,46.683 ; -49.342,46.37 ccw(c-49.342,46.94) SW.2@-48.833,46.683 ; -49.342,46.37 cw(c-49.342,45.561) SW.2@-48.752,46.114 ; -49.342,46.37 ccw(c-49.342,46.94) SW.2@-48.833,46.683 ; -49.342,46.37 cw(c-49.342,45.561) SW.2@-48.752,46.114 ; -49.26,46.288 ccw(c-48.452,47.096) SW.2@-48.337,45.959 ; -49.26,46.288 ccw(c-48.452,47.096) SW.2@-48.337,45.959 ; -49.26,46.288 ccw(c-48.452,47.096) SW.2@-48.337,45.959 ; -49.215,63.007 cw(c-50.069,62.154) CN5.2@-48.862,62.154 ; -49.215,63.007 ccw(c-48.362,63.861) CN5.2@-48.362,62.654 ; -49.215,63.007 ccw(c-48.362,63.861) CN5.2@-48.362,62.654 ; -49.215,63.007 cw(c-50.069,62.154) CN5.2@-48.862,62.154 ; -49.215,63.007 ccw(c-48.362,63.861) CN5.2@-48.362,62.654 ; -49.215,63.007 cw(c-50.069,62.154) CN5.2@-48.862,62.154 ; SW.2@-48.387,46.457 -44.45,46.457 -39.583,41.59 -32.529,41.59 -32.519,41.58 -27.432,41.58 ; CN5.2@-48.362,61.654 cw(c-48.362,60.447) -47.508,61.3 ; CN5.2@-48.362,61.654 cw(c-48.362,60.447) -47.508,61.3 ; CN5.2@-48.362,61.654 cw(c-48.362,60.447) -47.508,61.3 ; CN5.2@-48.362,62.154 ccw(c-47.505,62.329) -47.732,61.485 ; CN5.2@-48.362,62.154 ccw(c-47.505,62.329) -47.732,61.485 ; CN5.2@-48.362,62.154 ccw(c-47.505,62.329) -47.732,61.485 ; SW.2@-48.033,46.103 cw(c-47.18,45.249) -47.18,46.457 ; SW.2@-48.033,46.103 cw(c-47.18,45.249) -47.18,46.457 ; SW.2@-48.033,46.103 cw(c-47.18,45.249) -47.18,46.457 ; SW.2@-48.033,46.81 ccw(c-47.18,47.664) -47.18,46.457 ; SW.2@-48.033,46.81 ccw(c-47.18,47.664) -47.18,46.457 ; SW.2@-48.033,46.81 ccw(c-47.18,47.664) -47.18,46.457 ; CN5.2@-47.862,62.154 ccw(c-46.654,62.154) -47.508,61.3 ; CN5.2@-47.862,62.154 ccw(c-46.654,62.154) -47.508,61.3 ; CN5.2@-47.862,62.154 ccw(c-46.654,62.154) -47.508,61.3 ; -44.626,61.203 cw(c-44.626,60.479) R6.2@-44.114,60.991 ; -44.626,61.203 ccw(c-44.626,61.927) R6.2@-44.114,61.415 ; -44.626,61.203 ccw(c-44.626,61.927) R6.2@-44.114,61.415 ; -44.626,61.203 cw(c-44.626,60.479) R6.2@-44.114,60.991 ; -44.626,61.203 ccw(c-44.626,61.927) R6.2@-44.114,61.415 ; -44.626,61.203 cw(c-44.626,60.479) R6.2@-44.114,60.991 ; C12.2@-42.211,68.186 ccw(c-42.894,68.869) -41.929,68.869 ; C12.2@-42.211,68.186 ccw(c-42.894,68.869) -41.929,68.869 ; C12.2@-42.211,68.186 ccw(c-42.894,68.869) -41.929,68.869 ; -41.929,68.869 ccw(c-40.963,68.869) C12.2@-41.646,68.186 ; -41.929,68.869 ccw(c-40.963,68.869) C12.2@-41.646,68.186 ; -41.929,68.869 ccw(c-40.963,68.869) C12.2@-41.646,68.186 ; C12.2@-41.646,67.521 cw(c-41.02,66.895) -41.02,67.78 ; C12.2@-41.646,67.521 cw(c-41.02,66.895) -41.02,67.78 ; C12.2@-41.646,67.521 cw(c-41.02,66.895) -41.02,67.78 ; C12.2@-41.646,68.086 ccw(c-40.906,68.826) -40.906,67.78 ; C12.2@-41.646,68.086 ccw(c-40.906,68.826) -40.906,67.78 ; C12.2@-41.646,68.086 ccw(c-40.906,68.826) -40.906,67.78 ; -37.92,67.017 cw(c-36.941,67.017) U1.1@-37.633,67.709 ; -37.92,67.017 cw(c-36.941,67.017) U1.1@-37.633,67.709 ; -37.92,67.017 cw(c-36.941,67.017) U1.1@-37.633,67.709 ; -37.92,67.273 ccw(c-36.941,67.273) U1.2@-37.633,66.581 ; -37.92,67.273 ccw(c-36.941,67.273) U1.2@-37.633,66.581 ; -37.92,67.273 ccw(c-36.941,67.273) U1.2@-37.633,66.581 ; -37.858,66.969 cw(c-38.352,66.684) U1.2@-37.801,66.536 ; -37.858,66.969 cw(c-38.352,66.684) U1.2@-37.801,66.536 ; -37.858,66.969 cw(c-38.352,66.684) U1.2@-37.801,66.536 ; -37.858,67.321 ccw(c-38.352,67.606) U1.1@-37.801,67.754 ; -37.858,67.321 ccw(c-38.352,67.606) U1.1@-37.801,67.754 ; -37.858,67.321 ccw(c-38.352,67.606) U1.1@-37.801,67.754 ; R18.2@-27.049,43.161 cw(c-27.561,42.649) -26.837,42.649 ; R18.2@-27.049,43.161 cw(c-27.561,42.649) -26.837,42.649 ; R18.2@-27.049,43.161 cw(c-27.561,42.649) -26.837,42.649 ; -26.837,42.649 cw(c-26.113,42.649) R18.2@-26.625,43.161 ; -26.837,42.649 cw(c-26.113,42.649) R18.2@-26.625,43.161 ; -26.837,42.649 cw(c-26.113,42.649) R18.2@-26.625,43.161 ; U5.8@-23.714,19.534 cw(c-23.361,19.181) -23.361,19.68 ; U5.8@-23.714,19.534 cw(c-23.361,19.181) -23.361,19.68 ; U5.8@-23.714,19.534 cw(c-23.361,19.181) -23.361,19.68 ; -22.546,19.68 cw(c-22.546,18.714) C20.2@-21.863,19.397 ; -22.546,19.68 ccw(c-22.546,20.646) C20.2@-21.863,19.963 ; -22.546,19.68 ccw(c-22.546,20.646) C20.2@-21.863,19.963 ; -22.546,19.68 cw(c-22.546,18.714) C20.2@-21.863,19.397 ; -22.546,19.68 ccw(c-22.546,20.646) C20.2@-21.863,19.963 ; -22.546,19.68 cw(c-22.546,18.714) C20.2@-21.863,19.397 ; C20.2@-21.097,19.397 cw(c-20.592,18.892) -20.592,19.606 ; C20.2@-21.097,19.397 cw(c-20.592,18.892) -20.592,19.606 ; C20.2@-21.097,19.397 cw(c-20.592,18.892) -20.592,19.606 ; -20.519,19.682 ccw(c-20.361,20.273) v1@-20.055,19.743 ; -20.519,19.682 ccw(c-20.361,20.273) v1@-20.055,19.743 ; -20.519,19.682 ccw(c-20.361,20.273) v1@-20.055,19.743 ; R8.2@3.882,31.408 cw(c4.394,30.896) 4.394,31.62 ; R8.2@3.882,31.408 cw(c4.394,30.896) 4.394,31.62 ; R8.2@3.882,31.408 cw(c4.394,30.896) 4.394,31.62 ; R8.2@3.882,31.832 ccw(c4.394,32.344) 4.394,31.62 ; R8.2@3.882,31.832 ccw(c4.394,32.344) 4.394,31.62 ; R8.2@3.882,31.832 ccw(c4.394,32.344) 4.394,31.62 ; 5.589,31.62 cw(c5.589,30.896) R7.2@6.101,31.408 ; 5.589,31.62 ccw(c5.589,32.344) R7.2@6.101,31.832 ; 5.589,31.62 ccw(c5.589,32.344) R7.2@6.101,31.832 ; 5.589,31.62 cw(c5.589,30.896) R7.2@6.101,31.408 ; 5.589,31.62 ccw(c5.589,32.344) R7.2@6.101,31.832 ; 5.589,31.62 cw(c5.589,30.896) R7.2@6.101,31.408 ; R7.2@7.025,31.408 cw(c7.538,30.896) 7.538,31.62 ; R7.2@7.025,31.408 cw(c7.538,30.896) 7.538,31.62 ; R7.2@7.025,31.408 cw(c7.538,30.896) 7.538,31.62 ; R7.2@7.025,31.832 ccw(c7.538,32.344) 7.538,31.62 ; R7.2@7.025,31.832 ccw(c7.538,32.344) 7.538,31.62 ; R7.2@7.025,31.832 ccw(c7.538,32.344) 7.538,31.62 ; 7.727,31.62 cw(c7.727,31.095) v4@8.098,31.466 ; 7.727,31.62 cw(c7.727,31.095) v4@8.098,31.466 ; 7.727,31.62 cw(c7.727,31.095) v4@8.098,31.466 ; ISP2.1@16.414,43.096 cw(c17.267,42.243) 17.267,43.45 ; ISP2.1@16.414,43.096 cw(c17.267,42.243) 17.267,43.45 ; ISP2.1@16.414,43.096 cw(c17.267,42.243) 17.267,43.45 ; ISP2.1@16.414,43.804 ccw(c17.267,44.657) 17.267,43.45 ; ISP2.1@16.414,43.804 ccw(c17.267,44.657) 17.267,43.45 ; ISP2.1@16.414,43.804 ccw(c17.267,44.657) 17.267,43.45 ; C23.2@21.194,39.152 ccw(c20.537,39.809) 21.466,39.809 ; C23.2@21.194,39.152 ccw(c20.537,39.809) 21.466,39.809 ; C23.2@21.194,39.152 ccw(c20.537,39.809) 21.466,39.809 ; v4@21.332,40.788 cw(c21.007,40.463) 21.466,40.463 ; v4@21.332,40.788 cw(c21.007,40.463) 21.466,40.463 ; v4@21.332,40.788 cw(c21.007,40.463) 21.466,40.463 ; v4@21.332,41 ccw(c21.007,41.325) 21.466,41.325 ; v4@21.332,41 ccw(c21.007,41.325) 21.466,41.325 ; v4@21.332,41 ccw(c21.007,41.325) 21.466,41.325 ; 21.466,39.809 ccw(c22.395,39.809) C23.2@21.738,39.152 ; 21.466,39.809 ccw(c22.395,39.809) C23.2@21.738,39.152 ; 21.466,39.809 ccw(c22.395,39.809) C23.2@21.738,39.152 ; C20.2@-21.097,19.963 ccw(c-20.236,20.824) -20.236,19.606 cw(c-20.236,20.824) C20.2@-21.097,19.963 ; -20.377,19.606 ccw(c-20.377,20.047) -20.065,19.735 cw(c-20.377,20.047) -20.377,19.606 ; -19.58,19.7 ccw(c-19.58,20.7) -18.873,19.993 cw(c-19.58,20.7) -19.58,19.7 ; -19.532,19.7 cw(c-19.532,18.768) -18.873,19.427 ccw(c-19.532,18.768) -19.532,19.7
  Top Layer w1: U6.2@21.18,29.973 ccw(c18.535,32.619) 22.276,32.619 ; U6.2@22.276,29.337 CA1.1@22.276,34.595 ; 22.276,32.559 ccw(c25.932,32.559) U6.2@23.347,29.973 ; CA1.1@21.865,34.447 cw(c20.875,33.457) 22.276,33.457 ; CA1.1@21.865,34.447 cw(c20.875,33.457) 22.276,33.457 ; CA1.1@21.865,34.447 cw(c20.875,33.457) 22.276,33.457 ; 22.276,33.649 cw(c23.405,33.649) CA1.1@22.607,34.447 ; 22.276,33.649 cw(c23.405,33.649) CA1.1@22.607,34.447 ; 22.276,33.649 cw(c23.405,33.649) CA1.1@22.607,34.447
  Bottom Layer w0.3: v1@-11.1,46.94 -11.1,60.63 -10.897,60.833 v1(-9.55,60.833) ; v1(-9.64,72.44) -9.64,65.76 v1(-9.55,65.67) ; v1@-11.206,46.896 ccw(c-11.462,47.152) -11.1,47.152 ; v1@-11.206,46.896 ccw(c-11.462,47.152) -11.1,47.152 ; v1@-11.206,46.896 ccw(c-11.462,47.152) -11.1,47.152 ; v1@-11.18,53.793 cw(c-11.375,53.598) -11.1,53.598 ; v1@-11.18,53.793 cw(c-11.375,53.598) -11.1,53.598 ; v1@-11.18,53.793 cw(c-11.375,53.598) -11.1,53.598 ; v1@-11.18,54.005 ccw(c-11.375,54.199) -11.1,54.199 ; v1@-11.18,54.005 ccw(c-11.375,54.199) -11.1,54.199 ; v1@-11.18,54.005 ccw(c-11.375,54.199) -11.1,54.199 ; -11.1,47.152 ccw(c-10.738,47.152) v1@-10.994,46.896 ; -11.1,47.152 ccw(c-10.738,47.152) v1@-10.994,46.896 ; -11.1,47.152 ccw(c-10.738,47.152) v1@-10.994,46.896 ; -11.1,53.475 cw(c-10.65,53.475) v1@-10.968,53.793 ; -11.1,53.475 cw(c-10.65,53.475) v1@-10.968,53.793 ; -11.1,53.475 cw(c-10.65,53.475) v1@-10.968,53.793 ; -11.1,54.323 ccw(c-10.65,54.323) v1@-10.968,54.005 ; -11.1,54.323 ccw(c-10.65,54.323) v1@-10.968,54.005 ; -11.1,54.323 ccw(c-10.65,54.323) v1@-10.968,54.005 ; -9.913,60.833 cw(c-9.913,60.471) v1@-9.656,60.727 ; -9.913,60.833 ccw(c-9.913,61.195) v1@-9.656,60.939 ; -9.913,60.833 ccw(c-9.913,61.195) v1@-9.656,60.939 ; -9.913,60.833 cw(c-9.913,60.471) v1@-9.656,60.727 ; -9.913,60.833 ccw(c-9.913,61.195) v1@-9.656,60.939 ; -9.913,60.833 cw(c-9.913,60.471) v1@-9.656,60.727 ; v1@-9.746,72.334 cw(c-10.002,72.078) -9.64,72.078 ; v1@-9.746,72.334 cw(c-10.002,72.078) -9.64,72.078 ; v1@-9.746,72.334 cw(c-10.002,72.078) -9.64,72.078 ; -9.64,66.249 ccw(c-8.971,66.249) v1@-9.444,65.776 ; -9.64,66.249 ccw(c-8.971,66.249) v1@-9.444,65.776 ; -9.64,66.249 ccw(c-8.971,66.249) v1@-9.444,65.776 ; -9.64,72.078 cw(c-9.278,72.078) v1@-9.534,72.334 ; -9.64,72.078 cw(c-9.278,72.078) v1@-9.534,72.334 ; -9.64,72.078 cw(c-9.278,72.078) v1@-9.534,72.334
  Bottom Layer w0.4: v6@-22.53,11.162 -22.267,11.425 ; v1@-16.84,33.71 -16.84,23.02 -22.267,17.593 -22.267,11.425 ; v6@-22.636,11.056 ccw(c-23.528,11.948) -22.267,11.948 ; v6@-22.636,11.056 ccw(c-23.528,11.948) -22.267,11.948 ; v6@-22.636,11.056 ccw(c-23.528,11.948) -22.267,11.948 ; v6@-22.551,11.099 ccw(c-22.597,11.425) -22.267,11.425 ; v6@-22.551,11.099 ccw(c-22.597,11.425) -22.267,11.425 ; v6@-22.551,11.099 ccw(c-22.597,11.425) -22.267,11.425 ; v6@-22.385,10.988 cw(c-21.945,11.104) -22.267,11.425 ; v6@-22.385,10.988 cw(c-21.945,11.104) -22.267,11.425 ; v6@-22.385,10.988 cw(c-21.945,11.104) -22.267,11.425 ; -16.84,33.426 cw(c-16.496,33.426) v1@-16.739,33.669 ; -16.84,33.426 cw(c-16.496,33.426) v1@-16.739,33.669 ; -16.84,33.426 cw(c-16.496,33.426) v1@-16.739,33.669 ; -20.423,19.437 cw(c-20.03,19.045) -20.03,19.6 ccw(c-20.03,19.045) -20.423,19.437 ; v1@-19.93,19.7 cw(c-19.375,19.7) -19.767,20.093 ccw(c-19.375,19.7) v1@-19.93,19.7
  Bottom Layer w0.5: v1@-50.749,24.028 v1@-50.749,69.875 ; v6(-22.53,10.95) v6@-22.53,11.162 ; v1@-16.84,33.71 v1(-16.81,33.74) ; v1(-16.82,34.31) -16.82,45.57 -15.6,46.79 v1(-11.1,46.79) v1@-10.994,46.896 ; v4(8.204,31.572) 8.204,33.604 9.957,35.357 13.386,35.357 18.923,40.894 v4(21.438,40.894) ; -16.82,35.752 ccw(c-14.83,35.752) v1@-16.237,34.345 ; -16.82,35.752 ccw(c-14.83,35.752) v1@-16.237,34.345 ; -16.82,35.752 ccw(c-14.83,35.752) v1@-16.237,34.345 ; -16.82,42.225 cw(c-16.267,42.225) v4@-16.658,42.617 ; -16.82,42.225 cw(c-16.267,42.225) v4@-16.658,42.617 ; -16.82,42.225 cw(c-16.267,42.225) v4@-16.658,42.617 ; -16.82,43.22 ccw(c-16.267,43.22) v4@-16.658,42.829 ; -16.82,43.22 ccw(c-16.267,43.22) v4@-16.658,42.829 ; -16.82,43.22 ccw(c-16.267,43.22) v4@-16.658,42.829
  other v1: -50.724,24.049 -16.262,33.74 -15.715,33.74 -15.168,33.74 -14.62,33.74 -16.272,34.31 -15.178,34.31 -14.63,34.31 -50.699,47.875 -50.749,64.562
pads on no net: JTAG.17 JTAG.19 P6.5 P6.6 P8.3 P8.4 U1. U1.3 U1.4 U1.5 U1.6 U1.8 U1.9 U1.13 U1.16 U1.17 U1.21 U1.23 U1.24 U1.29 U2.2 U2.3 U2.5 U4.2 U4.3 U4.6 U4.8 U4.9 U4.10 U4.11 U4.12 U4.14 U4.19 U4.22 U4.24 U4.27 U4.28

## Polygon pours and split planes (outlines as drawn)
GND1 on Top Layer "Top Layer-No Net" (solid, remove dead copper, pour order 13): -0.127,92.151 -0.113,92.165 26.645,92.165 27.013,92.165 27.686,91.492 27.762,91.416 27.762,56.389 0.076,56.389 -0.127,56.593 -0.127,92.151
GND on Top Layer "Top Layer-No Net" (solid, remove dead copper, pour order 11): 0.047,45.801 0.097,45.852 27.91,45.852 27.91,1.097 27.758,0.945 27.047,0.233 26.615,0.233 0.097,0.233 0.047,0.284 0.047,45.852
GND on Top Layer "Top Layer-No Net" (solid, remove dead copper, pour order 10): -54.356,82.88 -52.287,84.949 -45.056,84.949 -44.387,84.28 -40.028,79.921 -39.955,79.921 -35.595,79.921 -35.525,79.851 -35.497,79.824 -35.497,77.372 -35.497,53.038 -35.142,52.683 -34.862,52.403 -24.245,52.403 -18.403,52.403 -18.124,52.683 -18.149,52.708 -18.149,55.451 -18.149,81.69 -16.955,82.883 -16.005,83.834 -16.005,84.031 -8.085,84.031 -8.08,84.026 -7.024,84.026 -7.024,83.918 -4.236,81.13 -1.238,81.13 -0.877,81.13 -0.369,80.623 -0.268,80.521 -0.268,80.293 -0.268,11.814 -0.369,11.713 -0.903,11.179 -0.928,11.179 -4.187,11.179 -4.236,11.13 -11.166,4.2 -11.166,1.4 -11.19,1.377 -11.19,1.121 -11.19,0.892 -11.317,0.765 -11.85,0.232 -12.079,0.232 -12.334,0.232 -12.436,0.13 -24.321,0.13 -48.629,0.13 -48.705,0.206 -49.137,0.638 -49.137,0.968 -49.137,4.115 -49.166,4.143 -54.356,9.333 -54.356,9.4 -54.356,82.88 -52.287,84.949
GND on Bottom Layer "Top Layer-No Net" (solid, remove dead copper, pour order 8): 0.025,45.771 0.076,45.822 27.889,45.822 27.889,1.067 27.737,0.914 27.026,0.203 26.594,0.203 0.076,0.203 0.025,0.254 0.025,45.822
GND1 on Bottom Layer "Top Layer-No Net" (solid, remove dead copper, pour order 12): 0,92.227 0.014,92.242 26.772,92.242 27.14,92.242 27.813,91.568 27.889,91.492 27.889,56.466 0.203,56.466 0,56.669 0,92.227
VDD33 on Bottom Layer "Top Layer-No Net 1" (solid, pour order 14): -17.12,33.11 -14.36,33.11 -14.22,33.25 -14.22,34.71 -14.33,34.82 -17.15,34.82 -17.26,34.71 -17.26,33.25
GND on Bottom Layer "Top Layer-No Net" (solid, remove dead copper, pour order 9): -54.385,82.575 -52.316,84.644 -45.086,84.644 -44.417,83.975 -40.058,79.616 -39.984,79.616 -35.624,79.616 -35.554,79.546 -35.527,79.519 -35.527,77.067 -35.527,52.733 -35.171,52.378 -34.892,52.098 -24.274,52.098 -18.432,52.098 -18.153,52.378 -18.178,52.403 -18.178,55.146 -18.178,81.385 -16.985,82.578 -16.034,83.529 -16.034,83.726 -8.114,83.726 -8.109,83.721 -7.053,83.721 -7.053,83.613 -4.265,80.825 -1.267,80.825 -0.906,80.825 -0.398,80.318 -0.297,80.216 -0.297,79.988 -0.297,11.509 -0.398,11.408 -0.932,10.874 -0.957,10.874 -4.216,10.874 -4.265,10.825 -11.195,3.895 -11.195,1.095 -11.219,1.072 -11.219,0.816 -11.219,0.587 -11.346,0.46 -11.879,-0.073 -12.108,-0.073 -12.364,-0.073 -12.465,-0.175 -24.351,-0.175 -48.658,-0.175 -48.735,-0.099 -49.166,0.333 -49.166,0.663 -49.166,3.81 -49.195,3.838 -54.385,9.028 -54.385,9.095 -54.385,82.575 -52.316,84.644

## Keep-outs
Keep-Out Layer:
  circle w0.254: c-50,11 r1.7
  circle w0.254: c-50,81 r1.7
  circle w0.254: c-10,81 r1.7
  circle w0.254: c-10,11 r1.7
  lines w0.2: -0.025,80.95 -0.025,91.11 0.051,91.186
  lines w0.203: -0.03,52.07 27.838,52.07
  lines w0.254: -54.2,9.27 -54.2,15.23 ; -54.2,15 -54.2,82.75 ; -54.19,9.27 -49,4.08 -49,1.016 ccw(c-47.984,1.016) -47.984,0 -47,0 -13,0 -12.27,0 ccw(c-12.27,1.27) -11,1.27 -11,4.07 -4.07,11 -1.199,11 ; -54.19,82.75 -49,87.94 -49,90.73 ; -49,90.678 -49,90.73 ; -47.73,92 ccw(c-47.73,90.73) -49,90.73 ; -46.72,92 -45.99,92 -11.99,92 ; -12.195,92 cw(c-12.195,90.805) -11,90.805 -11,87.93 -4.07,81 -1.072,81 cw(c-1.072,79.928) 0,79.928 0,13 0,12.199 ; -0.03,26.263 -0.03,38.708 -0.03,42.972 ; -0.03,42.62 -0.03,79.71 ; -0.005,91.053 cw(c1.194,91.053) 1.194,92.252 ; 1.041,92.252 26.797,92.266 ; 1.067,0 26.568,0 ccw(c26.568,1.31) 27.878,1.31 27.878,94.183 ; 1.199,-0.005 cw(c1.199,1.194) 0,1.194 0,12.199 ; 26.679,92.268 cw(c26.679,91.069) 27.878,91.069 ; -1.199,11 ccw(c-1.199,12.199) 0,12.199 ; -1.199,11 ccw(c-1.199,12.199) 0,12.199